# Altium PCB XEDIEUKHIEN.PcbDoc
Units mm, origin at the board's own origin, x right, y up, seen from the top; angles counter-clockwise.
Board outline 40 x 70 mm, 2 copper layers (Top Layer, Bottom Layer); 23 components, 19 nets, 102 pads, 4 vias.
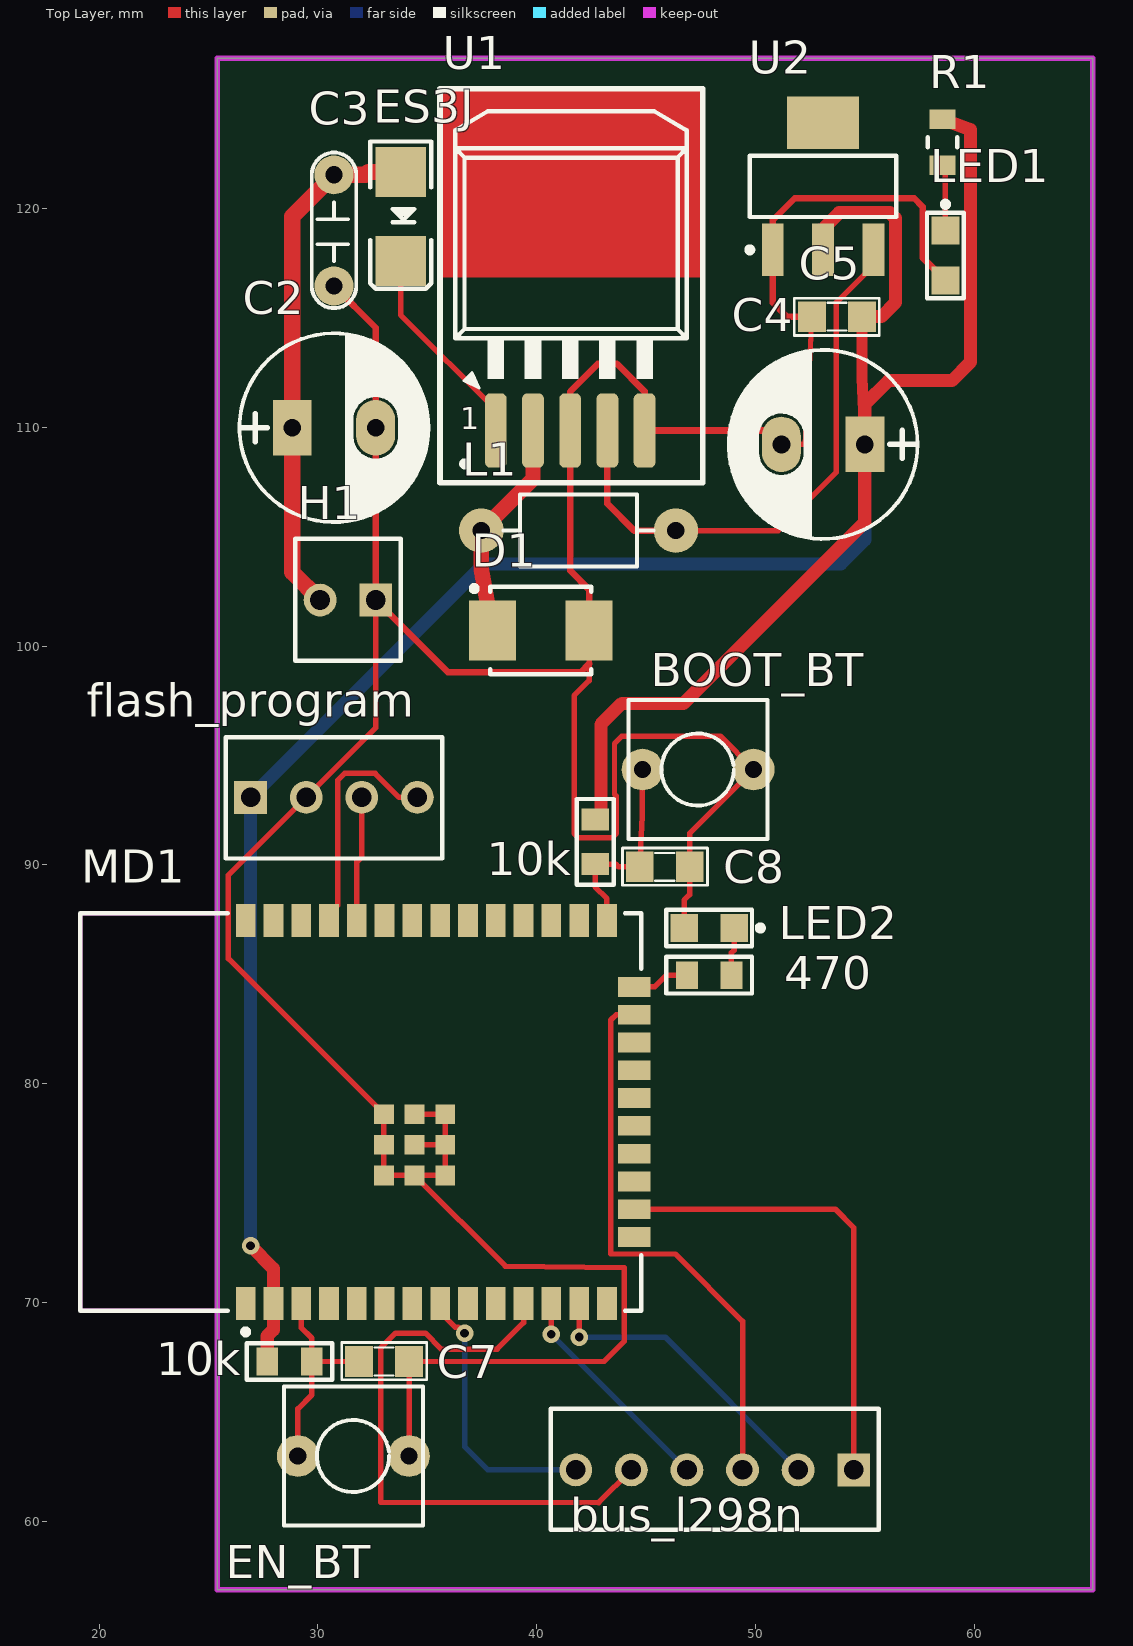
[diagram p0: Top Layer view]
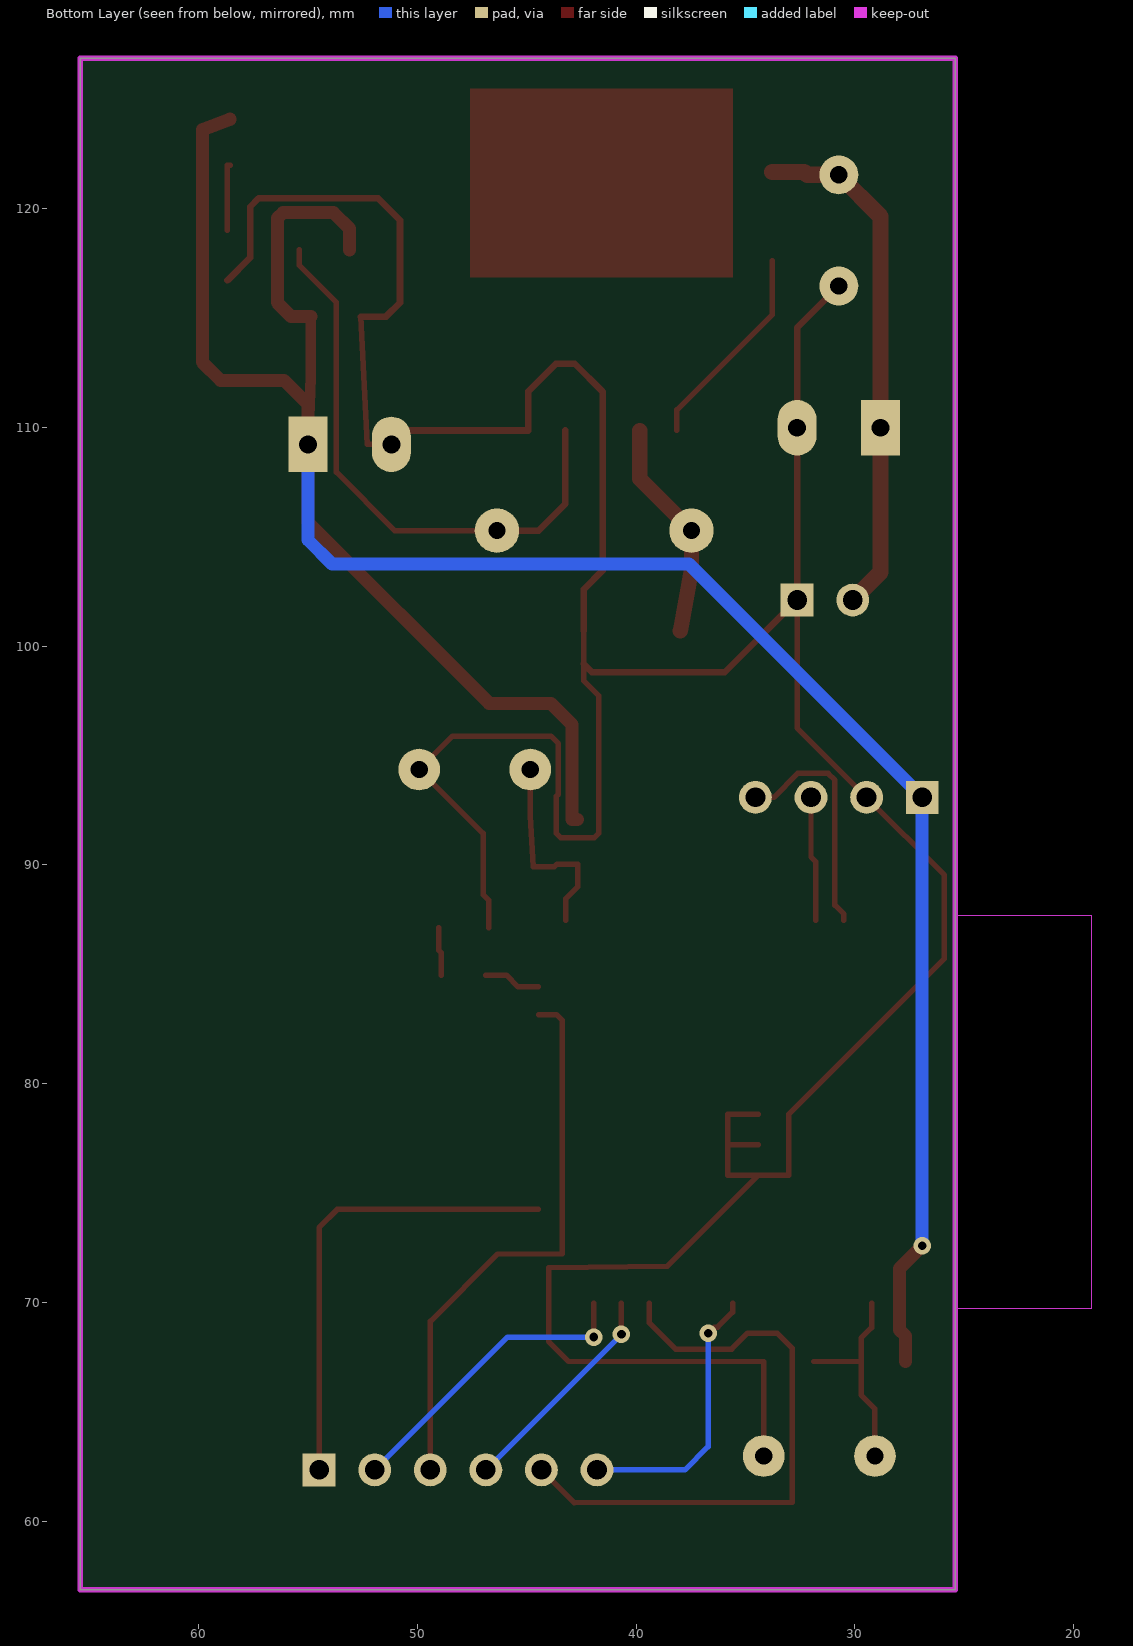
[diagram p1: Bottom Layer view, seen from below]
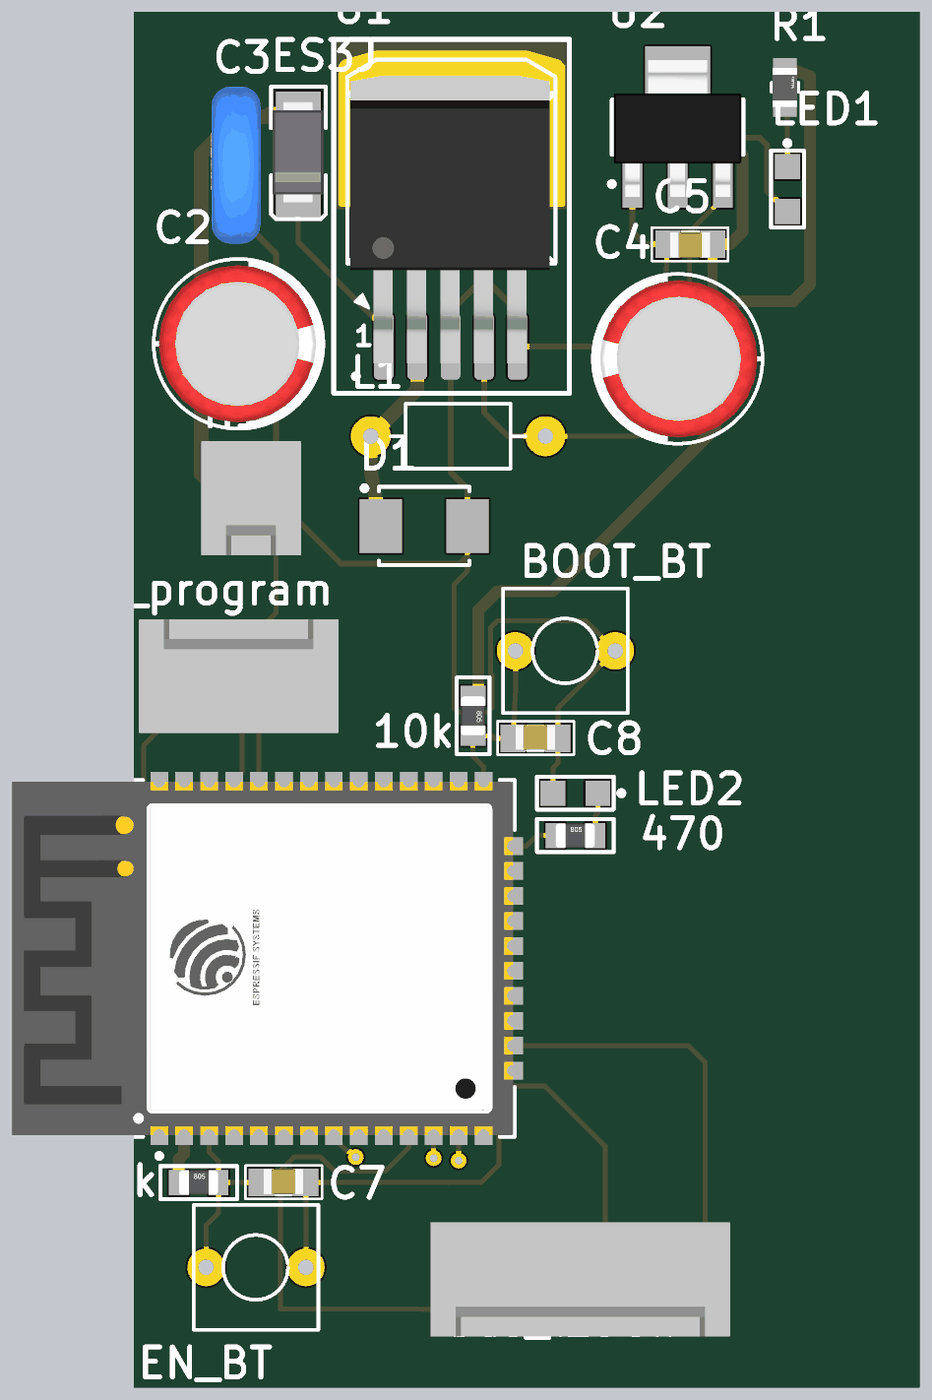
[diagram p2: 3D render of the assembled board from above, using the file's embedded part models]

## Layer stack, top to bottom
Top Solder: solder mask 0.0102, Solder Resist, Dk 3.5
Top Layer: signal copper 0.0356
Dielectric 1: dielectric 0.32, FR-4, Dk 4.8
Bottom Layer: signal copper 0.0356
Bottom Solder: solder mask 0.0102, Solder Resist, Dk 3.5

## Board outline
25.405,56.873 25.405,126.873 65.405,126.873 65.405,56.873

## Design rules (kind name [scope] priority, off if disabled: settings)
Clearance [All] p1: gap=0.2 ignorepadtopadclearanceinfootprint=FALSE
PolygonConnect [All] p1: connectstyle=Relief reliefconductorwidth=0.254 reliefentries=4 polygonreliefangle="90 Angle" airgapwidth=0.254
RoutingVias [All] p1: holewidth=0.4 width=0.8 viastyle="Through Hole" minholewidth=0.3 minwidth=0.6 maxholewidth=0.5 maxwidth=1
SolderMaskExpansion [All] p1: expansion=0.102 istentingtop=FALSE
Width 3.3 [InNet('+3.3')] p1: maxlimit=0.8 minlimit=0.5 preferedwidth=0.6 minimp=50.000000 maximp=50.000000 favimp=50.000000
Width 5V [InNet('+5')] p2: maxlimit=1 minlimit=0.6 preferedwidth=0.8 minimp=50.000000 maximp=50.000000 favimp=50.000000
Width 12V [InNet('+12')] p3: maxlimit=2 minlimit=1 preferedwidth=1.5 minimp=50.000000 maximp=50.000000 favimp=50.000000
Width sign [All] p4: maxlimit=0.3 minlimit=0.2 preferedwidth=0.25 minimp=50.000000 maximp=50.000000 favimp=50.000000
30 further rules are at their usual default settings.

## Components (designator, comment, footprint, x,y, rotation, side; value= is the part's Value field where it differs from the comment)
10k "R0805" "DIEN TRO 0805" 28.702,67.31 r180 top value=0805
10k "R0805" "DIEN TRO 0805" 42.672,91.059 r90 top value=0805
470 "R0805" "DIEN TRO 0805" 47.879,84.963 r180 top value=0805
BOOT_BT "BOOT_BT" SW2 44.831,94.361 r0 top value="SW chip 2 pin"
bus_l298n "Header6" HDR6 54.483,62.357 r180 top
C2 "100uF/35V" CP1.5/3.4 28.829,109.982 r0 top value=100uF/35V/50V
C3 "104" CN2 30.734,116.459 r90 top value=0.1uF
C4 "100uF/35V" CP1.5/3.4 54.991,109.22 r180 top value=100uF/35V/50V
C5 "103" SM-0805 53.721,115.062 r0 top
C7 "104" SM-0805 33.02,67.31 r180 top value=103
C8 "104" SM-0805 45.847,89.916 r180 top value=103
D1 "SS24_DIODE" ONSC-SMB-2-403A-03_V 40.183,100.711 r0 top
EN_BT "SW" SW2 29.083,62.992 r0 top value="SW chip 2 pin"
ES3J "Diode SMD" DIO-SMD-106 33.782,119.634 r90 top value=1N5007
flash_program "Header4" HDR4 26.924,93.091 r0 top
H1 "Header2" HDR2 32.639,102.108 r180 top
L1 "47uH" L/0.4 37.465,105.283 r0 top value="150 mH"
LED1 "" LED0805 58.674,117.856 r270 top
LED2 "LED3" LED0805 47.879,87.122 r180 top
MD1 "ESP32-WROOM-32D (16MB)" FP-ESP32-WROOM-32D_16MB-MFG 31.957,78.713 r90 top
R1 "SMD0805" FP-AT0805-MFG 58.547,123.029 r90 top
U1 "LM2596" TO263 41.148,115.824 r0 top
U2 "LM1117-3.3V" SOT223 53.086,121.01 r0 top

## Footprints (in the part's own frame and the unit in brackets; to place one, negate y for a bottom-side part, rotate by r counter-clockwise, add the part's x,y. Pads: shape width x height; smd on the part's side, far side on the other; paste and mask are expansions set on the pad)
CN2 [mil]
  round 70 hole 31: 1(0,0) 2(200,0)
  silkscreen extent -40,-40 240,40, body extent -54,-44 260,55, height 407
CP1.5/3.4 [mil] "Tu hoa 220->470uF,16V, 470uF/16V,25V"
  rect 70x100 hole 32: 1(0,0)
  oval 70x100 hole 32: 2(150,0)
  silkscreen extent -95,-170 245,170, body extent -85,-157 230,157, height 446
"DIEN TRO 0805" [mm] "Chip Resistor; Body 2.0 x 1.3 mm (LxW typ)"
  rect 1x1.27 smd: 1(-1.016,0) 2(1.016,0)
  silkscreen extent -1.96,-0.84 1.96,0.84, body extent -1,-0.62 1,0.63, height 0.78
DIO-SMD-106 [mil]
  rect 90x90.55 smd: 1(80,0) 2(-80,0)
  silkscreen extent -130,-55 135,55, body extent -99,-50 106,52, height 95
FP-AT0805-MFG [mm]
  rect 0.9x1.2 smd paste+0 mask+0: 1(-1.05,0) 2(1.05,0)
  silkscreen extent -0.22,-0.67 0.23,0.67, body extent -1.6,-0.77 1.6,0.77, height 0.25
FP-ESP32-WROOM-32D_16MB-MFG [mm]
  rect 1.5x0.9 smd paste+0 mask+0: 1(-8.75,5.26) 2(-8.75,3.99) 3(-8.75,2.72) 4(-8.75,1.45) 5(-8.75,0.18) 6(-8.75,-1.09) 7(-8.75,-2.36) 8(-8.75,-3.63) 9(-8.75,-4.9) 10(-8.75,-6.17) 11(-8.75,-7.44) 12(-8.75,-8.71) 13(-8.75,-9.98) 14(-8.75,-11.25) 25(8.75,-11.25) 26(8.75,-9.98) 27(8.75,-8.71) 28(8.75,-7.44) 29(8.75,-6.17) 30(8.75,-4.9) 31(8.75,-3.63) 32(8.75,-2.36) 33(8.75,-1.09) 34(8.75,0.18) 35(8.75,1.45) 36(8.75,2.72) 37(8.75,3.99) 38(8.75,5.26)
  rect 0.9x1.5 smd paste+0 mask+0: 15(-5.715,-12.5) 16(-4.445,-12.5) 17(-3.175,-12.5) 18(-1.905,-12.5) 19(-0.635,-12.5) 20(0.635,-12.5) 21(1.905,-12.5) 22(3.175,-12.5) 23(4.445,-12.5) 24(5.715,-12.5)
  rect 0.9x0.9 smd paste+0 mask+0: 39(-2.9,-2.46) 39(-2.9,-1.06) 39(-2.9,-3.86) 39(-1.5,-1.06) 39(-1.5,-3.86) 39(-1.5,-2.46) 39(-0.1,-1.06) 39(-0.1,-2.46) 39(-0.1,-3.86)
  Keep-Out Layer region: -9,6.56 9,6.56 9,12.75 -9,12.75
  silkscreen extent -10.17,-12.82 9.07,12.83, body extent -9.6,-13.35 9.6,12.93, height 0.25
HDR2 [mm] "Connector; Header; 2 Position"
  rect 1.5x1.5 hole 0.9: 1(0,0)
  round 1.5 hole 0.9: 2(2.54,0)
  silkscreen extent -1.14,-2.79 3.68,2.77, body extent -1.27,-2.92 3.81,2.88, height 11.72
HDR4 [mm] "Connector; Header; 4 Position"
  rect 1.5x1.5 hole 0.9: 1(0,0)
  round 1.5 hole 0.9: 2(2.54,0) 3(5.08,0) 4(7.62,0)
  silkscreen extent -1.14,-2.79 8.76,2.74, body extent -1.27,-2.92 8.89,2.88, height 11.72
HDR6 [mm] "Connector; Header; 6 Position"
  rect 1.5x1.5 hole 0.9: 1(0,0)
  round 1.5 hole 0.9: 2(2.54,0) 3(5.08,0) 4(7.62,0) 5(10.16,0) 6(12.7,0)
  silkscreen extent -1.14,-2.79 13.84,2.74, body extent -1.27,-2.92 13.97,2.88, height 11.72
L/0.4 [mil] "Inductor , 2 Pin, L 350mil, W 150 mil"
  round 80 hole 31: 1(0,0) 2(350,0)
  silkscreen extent 40,-65 310,65
LED0805 [mil] "Chip Resistor; Body 2.0 x 1.3 mm (LxW typ)"
  rect 50x50 smd: 1(-45,0) 2(45,0)
  silkscreen extent -97,-33 77,33, body extent -60,-25 60,25, height 47
ONSC-SMB-2-403A-03_V [mm] "Molded, 2-Leads, Body 4.6x3.95mm"
  rect 2.159x2.743 smd: 1(-2.21,0) 2(2.21,0)
  silkscreen extent -3.16,-2 2.3,2.05, body extent -2.3,-1.97 2.3,1.97, height 2.47
SM-0805 [mil] "Compoment SMD 80x50mil"
  rect 50x55 smd: 1(-45,0) 2(45,0)
  silkscreen extent -77,-34 76,33, body extent -40,-27 40,23, height 24
SOT223 [mm]
  rect 1x2.4 smd: 1(-2.3,-2.9) 2(0,-2.9) 3(2.3,-2.9)
  rect 3.3x2.4 smd: 4(0,2.9)
  silkscreen extent -3.47,-3.02 3.35,1.4, body extent -3.25,-3.56 3.25,3.4, height 1.68
SW2 [mil] "SW button 2pin, 250x 250 mil"
  round 75 hole 31: 1(0,0) 2(200,0)
  silkscreen extent -25,-125 225,125
TO263 [mm]
  rrect50% 1x3.4 smd: 1(-3.019,-5.969) 2(-1.319,-5.969) 4(2.081,-5.969) 5(3.781,-5.969)
  rrect50% 1x3.4 smd mask+0: 3(0.381,-5.969)
  Top Layer region: -5.568,1.016 6.432,1.016 6.432,9.65 -5.568,9.65
  silkscreen extent -5.57,-8.35 6.43,9.65, body extent -4.73,-6.84 5.43,7.8, height 4.57

## Part data
10k 10k 470: "Resistor SMD 0805", LatestRevisionDate=17-Jul-2002, LatestRevisionNote="Re-released for DXP Platform.", PackageReference=AXIAL-0.4, Published=8-Jun-2000, Publisher="Altium Limited"
BOOT_BT EN_BT: library part SW2, "Switch button 2 pin"
bus_l298n: "Header IDC, 6 x 1 Pin Vertical 2.54mm Pitch (Non-Boxed, Male)", Manufacturer="W¨¹rth Elektronik eiSos GmbH", partNo=613002143121, ComponentLink1 Description=Manufacturer, ComponentLink1URL=http://www.we-online.com, ComponentLink2 Description=Datasheet, ComponentLink2URL=http://katalog.we-online.de/em/datasheet/6130xx143121.pdf, Created by="Karrer Zheng", Created Date="29 March 2013", NoPins=02
C2 C4: library part CP3, "Cap 100uF/35V - 470uF/16V", Description 1="1000uF/6,3V - 470uF/16V - 330uF - 25V", Description 2="220uF/35V - 100uF/50V - 63V - 4,7uF/200V", Description 3="22uF => 33uF100V - 3,3uF => 4,7uF/250V", Description 4="2,2uF =>3,3uF/350 - 2,2uF/400V - 1uF/450V"
C3: library part CN2, "Cap np 104 => 105pF"
C5 C7 C8: library part CM, "Cap SMD"
D1: library part CMP-1055-00372-1, "Schottky Power Rectifier, 2-Pin SMB, Pb-Free, Tape and Reel", Manufacturer="On Semiconductor", PartNumber=SS24T3G, ComponentLink1Description="Manufacturer URL", ComponentLink1URL=http://www.onsemi.com/, ComponentLink2Description=Datasheet, ComponentLink2URL=http://www.onsemi.cn/pub_link/Collateral/SS24-D.PDF, ComponentLink3Description="Package Specification", ComponentLink3URL=http://www.onsemi.com/pub_link/Collateral/403A-03.PDF, Configuration=Single, DatasheetVersion="Rev. 4", IFSM Max (A)=75, Mounting Technology="Surface Mount", PackageDescription="2-Pin Small Molded Package, J-Bend Lead, Body 4.33 x 3.625 mm", PackageReference=SMB-2-403A-03, PackageVersion="Rev. J, 07/2012", Packing="Tape and Reel", RoHS=TRUE
ES3J: "Default Diode", Code - JEDEC=DO-214-AB, Published=8-Jun-2000, Publisher="Altium Limited", Revision="July-2002: Re-released for DXP Platform."
flash_program: "Header IDC, 4 x 1 Pin Vertical 2.54mm Pitch (Non-Boxed, Male)", Manufacturer="W¨¹rth Elektronik eiSos GmbH", partNo=613002143121, ComponentLink1 Description=Manufacturer, ComponentLink1URL=http://www.we-online.com, ComponentLink2 Description=Datasheet, ComponentLink2URL=http://katalog.we-online.de/em/datasheet/6130xx143121.pdf, Created by="Karrer Zheng", Created Date="29 March 2013", NoPins=02
H1: "Header IDC, 2 x 1 Pin Vertical 2.54mm Pitch (Non-Boxed, Male)", Manufacturer="W¨¹rth Elektronik eiSos GmbH", partNo=613002143121, ComponentLink1 Description=Manufacturer, ComponentLink1URL=http://www.we-online.com, ComponentLink2 Description=Datasheet, ComponentLink2URL=http://katalog.we-online.de/em/datasheet/6130xx143121.pdf, Created by="Karrer Zheng", Created Date="29 March 2013", NoPins=02
L1: library part L1, "Inductor"
LED1 LED2: library part LED0805, "LED SMD 0805"
MD1: library part CMP-194065-000022-1, "RX TXRX MOD WIFI TRACE ANT SMD", Case/Package=SMD/SMT, Frequency=2.5GHz, Max Operating Temperature=85°C, Min Operating Temperature=-40°C, Data Rate=150Mbps, Interface=I2C, Memory Size=536KB, Mount="Surface Mount", Packaging="Tape and Reel", Sensitivity=-98dBm
R1: library part CMP-03412-024763-2, "Thin Film Chip Resistors Automotive Grade 100kΩ 1% 50ppm/°C 0805", RoHS Compliant=Yes
U1: Max Input Voltage="12 V", Max Output Current="3 (6.0 peak) A", Max Output Voltage=mV, Temperature Range="-40 to +125 degC", Category=IC-Power, Min Input Voltage=mV, Min Output Voltage=mV, Mounting Technology="Surface Mount", Status=Unreleased, Supply Voltage=mV
U2: library part LM1117_1, "800mA Low-Dropout Linear Regulator", Creator="Nguyen Ba Bien", Website=http://group3i.net

## Via types
v1: diameter 0.8, hole 0.4, Top Layer to Bottom Layer, 4 vias

## Nets (pads, with @x,y where several pads share a name; then routed paths per layer and width w, separated by ;. In a path a pad name is that pad's centre, name@x,y a point inside that pad or via, vN(x,y) a via of type N, cw(c..) or ccw(c..) an arc to the next point about the centre after c; other vN are vias at no path point)
+3.3: 10k.2 C4.1 C5.2 flash_program.1 MD1.2 R1.2 U2.2 | length 123.3
  Top Layer w0.5: C5.2 54.864,112.268 C4.1
  Top Layer w0.6: v1(26.924,72.595) 27.967,71.552 MD1.2 27.967,68.759 27.686,68.478 10k.2@27.686,67.31 ; 10k.2@42.672,92.075 42.928,92.075 42.928,96.423 43.891,97.386 46.713,97.386 54.991,105.664 C4.1 54.991,111.049 56.083,112.141 58.979,112.141 59.817,112.979 59.817,123.596 R1.2 ; U2.2 53.086,119.075 53.825,119.814 56.134,119.814 56.39,119.558 56.39,115.697 55.755,115.062 C5.2
  Bottom Layer w0.6: v1(26.924,72.595) flash_program.1 37.592,103.759 53.899,103.759 54.991,104.851 C4.1
+5: D1.1 L1.1 U1.2 | length 10.2
  Top Layer w0.7: D1.1 37.465,103.505 L1.1 39.829,107.647 U1.2
+12: C2.1 C3.2 ES3J.1 H1.2 | length 23.8
  Top Layer w0.75: H1.2 28.829,103.378 C2.1 28.829,119.634 C3.2 32.182,121.539 32.309,121.666 ES3J.1
BOOT: 10k.1@42.672,90.043 BOOT_BT.1 C8.2 MD1.25 | length 9.3
  Top Layer w0.25: MD1.25 43.207,88.468 42.672,89.003 42.672,90.043 43.612,90.043 43.739,89.916 C8.2 44.831,92.253 BOOT_BT.1
EN: 10k.1@29.718,67.31 C7.2 EN_BT.1 MD1.3 | length 9.6
  Top Layer w0.25: EN_BT.1 29.083,65.151 29.718,65.786 10k.1@29.718,67.31 ; MD1.3 29.237,68.858 29.718,68.377 10k.1@29.718,67.31 ; C7.2 10k.1@29.718,67.31
ENA: bus_l298n.6 MD1.8 | length 12.6
  Top Layer w0.25: MD1.8 35.587,69.569 36.271,68.885 36.424,68.885 v1(36.703,68.605)
  Bottom Layer w0.25: v1(36.703,68.605) 36.703,63.424 37.77,62.357 bus_l298n.6
ENB: bus_l298n.1 MD1.16 | length 21.4
  Top Layer w0.25: MD1.16 53.645,74.268 54.483,73.43 bus_l298n.1
GND: BOOT_BT.2 C2.2 C3.1 C4.2 C5.1 C7.1 C8.1 D1.2 EN_BT.2 flash_program.2 H1.1 LED1.2 LED2.2 MD1.39 U1.3 U1.5 U2.1 | length 175.9
  Top Layer w0.25: H1.1 32.639,96.266 flash_program.2 25.908,89.535 25.908,85.722 33.017,78.613 33.017,77.213 33.017,75.813 MD1.39@34.417,75.813 ; EN_BT.2 C7.1 43.078,67.31 43.993,68.224 43.993,71.603 38.565,71.665 MD1.39@34.417,75.813 ; MD1.39@34.417,77.213 MD1.39@35.817,77.213 ; MD1.39@34.417,78.613 35.817,78.613 MD1.39@35.817,77.213 ; D1.2 42.393,99.187 42.393,98.425 41.707,97.739 41.707,91.44 41.91,91.237 43.434,91.237 43.637,91.44 43.637,93.142 43.553,93.226 43.553,95.547 43.891,95.885 48.387,95.885 BOOT_BT.2 46.99,91.44 C8.1 46.99,88.646 46.736,88.392 LED2.2 ; C4.2 52.273,109.22 C5.1 ; MD1.39@34.417,75.813 35.817,75.813 MD1.39@35.817,77.213
  Top Layer w0.3: C3.1 32.639,114.554 C2.2 H1.1 35.941,98.806 42.012,98.806 42.393,99.187 ; D1.2 42.393,102.591 41.529,103.455 U1.3 41.529,111.633 42.799,112.903 43.663,112.903 44.929,111.637 U1.5 51.181,109.855 C4.2 ; C5.1 51.421,115.062 50.786,115.697 U2.1 50.786,119.468 51.786,120.468 57.247,120.468 57.633,120.083 57.633,117.754 LED1.2
IN1: bus_l298n.5 MD1.11 | length 27.6
  Top Layer w0.25: MD1.11 39.397,69.088 38.189,67.88 35.632,67.88 34.907,68.605 33.553,68.605 32.868,67.92 32.868,60.884 42.824,60.858 bus_l298n.5
IN2: bus_l298n.4 MD1.12 | length 10.2
  Top Layer w0.25: v1(40.667,68.553) MD1.12
  Bottom Layer w0.25: v1(40.667,68.553) bus_l298n.4
IN3: bus_l298n.3 MD1.23 | length 25.9
  Top Layer w0.25: MD1.23 43.634,83.158 43.382,82.906 43.382,72.223 46.33,72.223 49.403,69.15 bus_l298n.3
IN4: bus_l298n.2 MD1.13 | length 14.1
  Top Layer w0.25: v1(41.937,68.428) MD1.13
  Bottom Layer w0.25: v1(41.937,68.428) 45.872,68.428 bus_l298n.2
Net470_1: 470.1 LED2.1 | length 2.2
  Top Layer w0.25: 470.1 48.895,85.979 49.022,86.106 LED2.1
Net470_2: 470.2 MD1.24 | length 2.6
  Top Layer w0.25: MD1.24 45.39,84.428 45.925,84.963 470.2
NetES3J_2: ES3J.2 U1.1 | length 9.5
  Top Layer w0.25: ES3J.2 33.782,115.142 38.129,110.795 U1.1
Netflash_program_3: flash_program.3 MD1.34 | length 5.7
  Top Layer w0.25: MD1.34 31.777,90.145 32.004,90.372 flash_program.3
Netflash_program_4: flash_program.4 MD1.35 | length 10.8
  Top Layer w0.25: MD1.35 30.507,87.757 30.912,88.162 30.912,93.878 31.217,94.183 32.614,94.183 33.706,93.091 flash_program.4
NetL1_2: L1.2 U1.4 U2.3 | length 26.3
  Top Layer w0.25: L1.2 51.029,105.283 53.696,107.95 53.696,115.708 55.386,117.399 U2.3
  Top Layer w0.3: U1.4 43.229,106.504 44.45,105.283 L1.2
NetLED1_1: LED1.1 R1.1 | length 3.1
  Top Layer w0.25: R1.1 58.674,121.979 LED1.1
pads on no net: MD1.1 MD1.4 MD1.5 MD1.6 MD1.7 MD1.9 MD1.10 MD1.14 MD1.15 MD1.17 MD1.18 MD1.19 MD1.20 MD1.21 MD1.22 MD1.26 MD1.27 MD1.28 MD1.29 MD1.30 MD1.31 MD1.32 MD1.33 MD1.36 MD1.37 MD1.38 U2.4

## Keep-outs
Keep-Out Layer:
  the board outline again, w0.254

## Text inside footprints (layer, text, board x,y; h text height)
U1: Top Overlay "1" at 36.503,109.906 h1